# Altium PCB SpaceVNXDaughterBoard.PcbDoc (part 2 of 2)
Units mm, origin at the board's own origin, x right, y up, seen from the top; angles counter-clockwise.
Board outline 55 x 84 mm, 4 copper layers (Top Layer, PWR, GND, Bottom Layer), stack 0.84 mm thick; 87 components, 125 nets, 647 pads, 201 vias.
Unrouted connection lines stored in the file: 124.
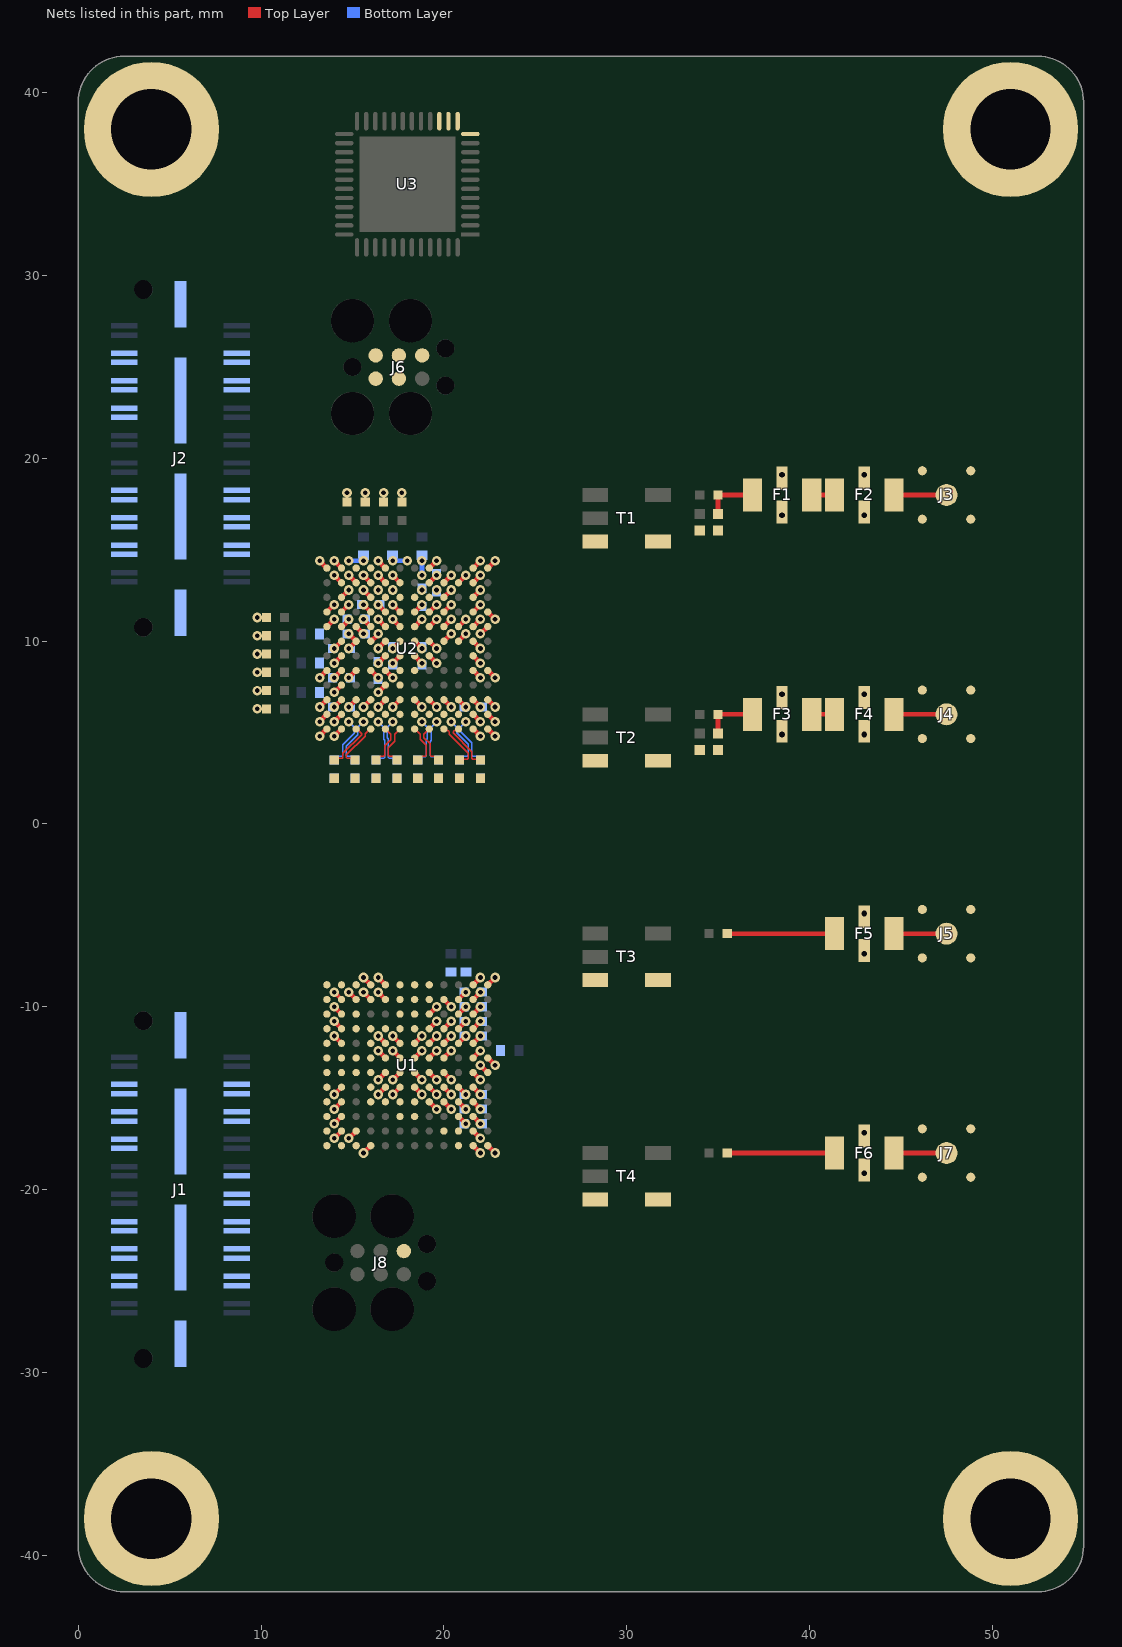
[diagram p4: the nets of this part, all layers, seen from the top]

## Via types
v1: diameter 0.525, hole 0.254, Top Layer to Bottom Layer, 189 vias
v2: diameter 0.61, hole 0.305, Top Layer to Bottom Layer, 12 vias

## Nets (pads, with @x,y where several pads share a name; then routed paths per layer and width w, separated by ;. In a path a pad name is that pad's centre, name@x,y a point inside that pad or via, vN(x,y) a via of type N, cw(c..) or ccw(c..) an arc to the next point about the centre after c; other vN are vias at no path point) (continued)
GND: C21.1 C22.1 C23.1 C24.1 C25.1 C26.1 C27.1 C28.1 C29.1 C30.1 C31.1 C32.1 C33.1 C34.1 C35.1 C36.1 C37.1 C38.1 C39.1 C40.1 C41.1 C42.1 C43.1 C44.1 C45.1 C46.1 C47.1 C48.1 C49.1 F1.2 F2.2 F3.2 F4.2 F5.2 F6.2 J1.G1 J1.G2 J1.G3 J1.G4 J2.G1 J2.G2 J2.G3 J2.G4 J3.G1 J3.G2 J3.G3 J3.G4 J4.G1 J4.G2 J4.G3 J4.G4 J5.G1 J5.G2 J5.G3 J5.G4 J6.6 J7.G1 J7.G2 J7.G3 J7.G4 J8.6 MP1.1 MP2.1 MP3.1 MP4.1 R1.1 R2.1 R3.1 R4.1 T1.1 T1.5 T2.1 T2.5 T3.1 T3.5 T4.1 T4.5 U1.A4 U1.A5 U1.A11 U1.A12 U1.B2 U1.B3 U1.B4 U1.B5 U1.B11 U1.C2 U1.C3 U1.C8 U1.C11 U1.D2 U1.D8 U1.D11 U1.E2 U1.E5 U1.E6 U1.E7 U1.E8 U1.E11 U1.F5 U1.F6 U1.F7 U1.F8 U1.F11 U1.F12 U1.G5 U1.G6 U1.G7 U1.G8 U1.G11 U1.G12 U1.H2 U1.H5 U1.H6 U1.H7 U1.H8 U1.H11 U1.J2 U1.J8 U1.J11 U1.K2 U1.K11 U1.L2 U1.L3 U1.L11 U1.M4 U1.M11 U1.M12 U2.A1 U2.A4 U2.A5 U2.A8 U2.A11 U2.A12 U2.B1 U2.B2 U2.B3 U2.B4 U2.B5 U2.B6 U2.B7 U2.B8 U2.B11 U2.B12 U2.C2 U2.C5 U2.C6 U2.C10 U2.D2 U2.D3 U2.E1 U2.E2 U2.E4 U2.E7 U2.F4 U2.F7 U2.F10 U2.G2 U2.G4 U2.G7 U2.G10 U2.H1 U2.H2 U2.H4 U2.H7 U2.J2 U2.J3 U2.K2 U2.K5 U2.K10 U2.L1 U2.L2 U2.L3 U2.L4 U2.L5 U2.L6 U2.L7 U2.L8 U2.L9 U2.L11 U2.L12 U2.M1 U2.M4 U2.M5 U2.M8 U2.M11 U2.M12 | length 61.7
  Top Layer w0.254: v1(13.2,4.8) U2.M12@13.6,5.2 ; v1(13.2,5.6) U2.M11@13.6,6 ; v1(13.2,8) U2.M8@13.6,8.4 ; v1(13.2,14.4) U2.M1@13.6,14 ; U2.M5@13.6,10.8 v1(14,11.2) ; U2.M4@13.6,11.6 v1(14,12) ; v1(14,-17.2) U1.L2@14.4,-16.8 ; v1(14,-16.4) U1.K2@14.4,-16 ; v1(14,-15.6) U1.J2@14.4,-15.2 ; v1(14,-14.8) U1.H2@14.4,-14.4 ; v1(14,-11.6) U1.E2@14.4,-12 ; v1(14,-10.8) U1.D2@14.4,-11.2 ; v1(14,-10) U1.C2@14.4,-10.4 ; v1(14,-9.2) U1.B2@14.4,-9.6 ; v1(14,4.8) U2.L12@14.4,5.2 ; v1(14,5.6) U2.L11@14.4,6 ; v1(14,7.2) U2.L9@14.4,7.6 ; v1(14,8) U2.L8@14.4,8.4 ; v1(14,8.8) U2.L7@14.4,9.2 ; v1(14,9.6) U2.L6@14.4,10 ; v1(14,13.6) U2.L2@14.4,13.2 ; v1(14,14.4) U2.L1@14.4,14 ; U2.L5@14.4,10.8 14.44,10.8 14.513,10.873 14.516,10.873 14.8,11.157 v1(14.8,11.2) ; U2.L4@14.4,11.6 v1(14.8,12) ; U2.L3@14.4,12.4 v1(14.8,12.8) ; v1(14.8,-17.2) U1.L3@15.2,-16.8 ; v1(14.8,-9.2) U1.B3@15.2,-9.6 ; v1(14.8,6.4) U2.K10@15.2,6.8 ; v1(14.8,13.6) U2.K2@15.2,13.2 ; U2.K5@15.2,10.8 v1(15.6,10.4) ; v1(15.6,-18) U1.M4@16,-17.6 ; v1(15.6,-9.2) U1.B4@16,-9.6 ; v1(15.6,-8.4) U1.A4@16,-8.8 ; v1(15.6,12.8) U2.J3@16,12.4 ; v1(15.6,13.6) U2.J2@16,13.2 ; v1(16.4,-14.8) U1.H5@16.8,-14.4 ; v1(16.4,-14) U1.G5@16.8,-13.6 ; v1(16.4,-12.4) U1.F5@16.8,-12.8 ; v1(16.4,-11.6) U1.E5@16.8,-12 ; v1(16.4,-9.2) U1.B5@16.8,-9.6 ; v1(16.4,-8.4) U1.A5@16.8,-8.8 ; v1(16.4,8.8) U2.H7@16.8,9.2 ; v1(16.4,12) U2.H4@16.8,11.6 ; v1(16.4,13.6) U2.H2@16.8,13.2 ; v1(16.4,14.4) U2.H1@16.8,14 ; v1(17.2,-14.8) U1.H6@17.6,-14.4 ; v1(17.2,-14) U1.G6@17.6,-13.6 ; v1(17.2,-12.4) U1.F6@17.6,-12.8 ; v1(17.2,-11.6) U1.E6@17.6,-12 ; v1(17.2,6.4) U2.G10@17.6,6.8 ; v1(17.2,8.8) U2.G7@17.6,9.2 ; v1(17.2,12) U2.G4@17.6,11.6 ; v1(17.2,13.6) U2.G2@17.6,13.2 ; U1.H7@18.4,-14.4 v1(18.8,-14.8) ; U1.G7@18.4,-13.6 v1(18.8,-14) ; U1.F7@18.4,-12.8 v1(18.8,-12.4) ; U1.E7@18.4,-12 v1(18.8,-11.6) ; U2.F10@18.4,6.8 v1(18.8,6.4) ; U2.F7@18.4,9.2 v1(18.8,8.8) ; U2.F4@18.4,11.6 v1(18.8,12) ; U1.J8@19.2,-15.2 v1(19.6,-15.6) ; U1.H8@19.2,-14.4 v1(19.6,-14.8) ; U1.G8@19.2,-13.6 v1(19.6,-14) ; U1.F8@19.2,-12.8 v1(19.6,-12.4) ; U1.E8@19.2,-12 v1(19.6,-11.6) ; U1.D8@19.2,-11.2 v1(19.6,-10.8) ; U1.C8@19.2,-10.4 v1(19.6,-10) ; U2.E7@19.2,9.2 v1(19.6,8.8) ; U2.E4@19.2,11.6 v1(19.6,12) ; U2.E2@19.2,13.2 v1(19.6,13.6) ; U2.E1@19.2,14 v1(19.6,14.4) ; U2.D3@20,12.4 v1(20.4,12.8) ; U2.D2@20,13.2 v1(20.4,13.6) ; U2.C10@20.8,6.8 v1(21.2,6.4) ; U2.C6@20.8,10 v1(21.2,10.4) ; U2.C5@20.8,10.8 v1(21.2,11.2) ; U2.C2@20.8,13.2 v1(21.2,13.6) ; U1.M11@21.6,-17.6 v1(22,-18) ; U1.L11@21.6,-16.8 v1(22,-17.2) ; U1.K11@21.6,-16 v1(22,-16.4) ; U1.J11@21.6,-15.2 v1(22,-15.6) ; U1.H11@21.6,-14.4 v1(22,-14.8) ; U1.G11@21.6,-13.6 v1(22,-14) ; U1.F11@21.6,-12.8 v1(22,-12.4) ; U1.E11@21.6,-12 v1(22,-11.6) ; U1.D11@21.6,-11.2 v1(22,-10.8) ; U1.C11@21.6,-10.4 v1(22,-10) ; U1.B11@21.6,-9.6 v1(22,-9.2) ; U1.A11@21.6,-8.8 v1(22,-8.4) ; U2.B12@21.6,5.2 v1(22,4.8) ; U2.B11@21.6,6 v1(22,5.6) ; U2.B8@21.6,8.4 v1(22,8) ; U2.B7@21.6,9.2 v1(22,8.8) ; U2.B6@21.6,10 v1(22,9.6) ; U2.B5@21.6,10.8 v1(22,11.2) ; U2.B4@21.6,11.6 v1(22,12) ; U2.B3@21.6,12.4 v1(22,12.8) ; U2.B2@21.6,13.2 v1(22,13.6) ; U2.B1@21.6,14 v1(22,14.4) ; v1(22,-13.2) U1.G12@22.4,-13.6 ; v1(22,10.4) U2.A5@22.4,10.8 ; U1.M12@22.4,-17.6 v1(22.8,-18) ; U1.F12@22.4,-12.8 v1(22.8,-13.2) ; U1.A12@22.4,-8.8 v1(22.8,-8.4) ; U2.A12@22.4,5.2 v1(22.8,4.8) ; U2.A11@22.4,6 v1(22.8,5.6) ; U2.A8@22.4,8.4 v1(22.8,8) ; U2.A4@22.4,11.6 v1(22.8,11.2) ; U2.A1@22.4,14 v1(22.8,14.4)
  other v1: 9.787,6.3 9.787,7.3 9.787,8.3 9.787,9.3 9.787,10.3 9.787,11.3 14.7,18.113 15.7,18.113 16.7,18.113 17.7,18.113
  other v2: 43,-19.105 43,-16.895 43,-7.105 43,-4.895 38.5,4.895 43,4.895 38.5,7.105 43,7.105 38.5,16.895 43,16.895 38.5,19.105 43,19.105
J1_C2P_CLK_N: J1.36 U2.K1
J1_C2P_CLK_P: J1.34 U2.J1
J1_P2C_CLK_N: J1.35
J1_P2C_CLK_P: J1.33
J1_REFCLK_N: J1.15
J1_REFCLK_P: J1.13
J1_RX0_N: J1.07 U1.E1
J1_RX0_P: J1.05 U1.F1
J1_RX1_N: J1.11 U1.D1
J1_RX1_P: J1.09 U1.C1
J1_RX2_N: J1.27 U1.A1
J1_RX2_P: J1.25 U1.B1
J1_RX3_N: J1.31 U1.A2
J1_RX3_P: J1.29 U1.A3
J1_TX0_N: C10.1 J1.12
J1_TX0_P: C9.1 J1.10
J1_TX1_N: C12.1 J1.08
J1_TX1_P: C11.1 J1.06
J1_TX2_N: C14.1 J1.32
J1_TX2_P: C13.1 J1.30
J1_TX3_N: C16.1 J1.28
J1_TX3_P: C15.1 J1.26
J2_C2P_CLK_N: J2.36 U1.A6
J2_C2P_CLK_P: J2.34 U1.A7
J2_P2C_CLK_N: J2.35 U1.B6
J2_P2C_CLK_P: J2.33 U1.B7
J2_REFCLK_N: J2.15
J2_REFCLK_P: J2.13
J2_RX0_N: J2.07 U1.H1
J2_RX0_P: J2.05 U1.G1
J2_RX1_N: J2.11 U1.J1
J2_RX1_P: J2.09 U1.K1
J2_RX2_N: J2.27 U1.M1
J2_RX2_P: J2.25 U1.L1
J2_RX3_N: J2.31 U1.M2
J2_RX3_P: J2.29 U1.M3
J2_TX0_N: C2.1 J2.08
J2_TX0_P: C1.1 J2.06
J2_TX1_N: C4.1 J2.12
J2_TX1_P: C3.1 J2.10
J2_TX2_N: C6.1 J2.28
J2_TX2_P: C5.1 J2.26
J2_TX3_N: C8.1 J2.32
J2_TX3_P: C7.1 J2.30
MCU_TCK: J6.3 U3.15
MCU_TDI: J6.4 U3.13
MCU_TDO: J6.2 U3.12
MCU_TMS: J6.1 U3.14
RF_FLT0: F1.3 F2.1 | length 1.2
  Top Layer w0.254: F1.3@40.126,18 F2.1@41.374,18
RF_FLT1: F3.3 F4.1 | length 1.2
  Top Layer w0.254: F3.3@40.126,6 F4.1@41.374,6
RF_MTH0: C17.2 F1.1 R2.2 | length 2.9
  Top Layer w0.254: R2.2@35,16.95 C17.2@35,18 F1.1@36.874,18
RF_MTH1: C18.2 F3.1 R4.2 | length 2.9
  Top Layer w0.254: R4.2@35,4.95 C18.2@35,6 F3.1@36.874,6
RF_MTH2: C19.2 F5.1 | length 5.9
  Top Layer w0.254: C19.2@35.5,-6 F5.1@41.374,-6
RF_MTH3: C20.2 F6.1 | length 5.9
  Top Layer w0.254: C20.2@35.5,-18 F6.1@41.374,-18
RF_RX0: F4.3 J4.S1 | length 2.9
  Top Layer w0.254: F4.3@44.626,6 J4.S1@47.5,6
RF_RX1: F2.3 J3.S1 | length 2.9
  Top Layer w0.254: F2.3@44.626,18 J3.S1@47.5,18
RF_TX0: F5.3 J5.S1 | length 2.9
  Top Layer w0.254: F5.3@44.626,-6 J5.S1@47.5,-6
RF_TX1: F6.3 J7.S1 | length 2.9
  Top Layer w0.254: F6.3@44.626,-18 J7.S1@47.5,-18
SPI_CLK: J1.20 U1.L9 U2.F8
SPI_SDI: J1.22 U1.L10 U2.G8
SPI_SDO: J1.24 U1.M10 U2.G9
TX0_N: C2.2 U2.K12 | length 2.7
  Top Layer w0.073: C2.2@14,3.5 14.086,3.586 14.428,3.586 14.471,3.629 14.471,3.861 15.5,4.89 15.5,4.951 15.251,5.2 U2.K12@15.2,5.2
TX0_P: C1.2 U2.J12 | length 2.7
  Top Layer w0.073: C1.2@15.143,3.5 15.057,3.586 14.714,3.586 14.671,3.629 14.671,3.778 15.7,4.807 15.7,4.951 15.949,5.2 U2.J12@16,5.2
TX1_N: C4.2 U2.H12 | length 2.3
  Top Layer w0.073: C4.2@16.286,3.5 16.499,3.713 16.714,3.713 16.757,3.756 16.757,4.268 17.1,4.611 17.1,4.9 U2.H12@16.8,5.2
TX1_P: C3.2 U2.G12 | length 2.3
  Top Layer w0.073: C3.2@17.428,3.5 17.215,3.713 17,3.713 16.957,3.756 16.957,4.185 17.3,4.528 17.3,4.9 U2.G12@17.6,5.2
TX2_N: C6.2 U2.F12 | length 2.3
  Top Layer w0.073: U2.F12@18.4,5.2 18.7,4.9 18.7,4.645 19.043,4.303 19.043,3.756 19,3.713 18.785,3.713 C6.2@18.571,3.5
TX2_P: C5.2 U2.E12 | length 2.3
  Top Layer w0.073: U2.E12@19.2,5.2 18.9,4.9 18.9,4.728 19.243,4.385 19.243,3.756 19.286,3.713 19.501,3.713 C5.2@19.714,3.5
TX3_N: C8.2 U2.D12 | length 2.8
  Top Layer w0.073: U2.D12@20,5.2 20.088,5.2 20.199,5.089 20.257,5.089 20.3,5.046 20.3,4.903 21.328,3.874 21.328,3.586 21.285,3.543 20.9,3.543 C8.2@20.857,3.5
TX3_P: C7.2 U2.C12 | length 2.8
  Top Layer w0.073: U2.C12@20.8,5.2 20.712,5.2 20.601,5.089 20.543,5.089 20.5,5.046 20.5,4.986 21.529,3.957 21.529,3.586 21.571,3.543 21.957,3.543 C7.2@22,3.5
TX4_N: C10.2 U2.K11 | length 2.8
  Bottom Layer w0.073: C10.2@14,3.5 14.213,3.713 14.429,3.713 14.471,3.756 14.471,4.325 15.1,4.954 15.1,5.3 v1(14.8,5.6)
TX4_P: C9.2 U2.J11 | length 2.8
  Bottom Layer w0.073: C9.2@15.143,3.5 14.93,3.713 14.715,3.713 14.672,3.756 14.672,4.242 15.3,4.871 15.3,5.3 v1(15.6,5.6)
TX5_N: C12.2 U2.H11 | length 2.6
  Bottom Layer w0.073: C12.2@16.286,3.5 16.372,3.586 16.714,3.586 16.757,3.629 16.757,4.581 16.7,4.639 16.7,5.3 v1(16.4,5.6)
TX5_P: C11.2 U2.G11 | length 2.6
  Bottom Layer w0.073: v1(17.2,5.6) 16.9,5.3 16.9,4.722 16.957,4.664 16.957,3.629 17,3.586 17.343,3.586 C11.2@17.429,3.5
TX6_N: C14.2 U2.F11 | length 2.6
  Bottom Layer w0.073: C14.2@18.572,3.5 18.754,3.683 19,3.683 19.043,3.726 19.043,4.596 19.1,4.653 19.1,5.3 v1(18.8,5.6)
TX6_P: C13.2 U2.E11 | length 2.6
  Bottom Layer w0.073: v1(19.6,5.6) 19.3,5.3 19.3,4.57 19.243,4.513 19.243,3.726 19.286,3.683 19.531,3.683 C13.2@19.714,3.5
TX7_N: C16.2 U2.D11 | length 2.8
  Bottom Layer w0.073: v1(20.4,5.6) 20.7,5.3 20.7,4.988 21.329,4.36 21.329,3.756 21.286,3.713 21.071,3.713 C16.2@20.857,3.5
TX7_P: C15.2 U2.C11 | length 2.8
  Bottom Layer w0.073: v1(21.2,5.6) 20.9,5.3 20.9,5.071 21.529,4.442 21.529,3.756 21.572,3.713 21.787,3.713 C15.2@22,3.5
VA11: C21.2 C22.2 FB1.2 U2.D6 U2.E3 U2.E5 U2.F3 U2.F5 U2.G3 U2.G5 U2.H3 U2.H5 U2.J6 | length 3.4
  Top Layer w0.254: U2.J6@16,10 16.04,10 16.113,10.073 16.116,10.073 16.4,10.357 v1(16.4,10.4) ; v1(16.4,11.2) U2.H5@16.8,10.8 ; v1(17.2,11.2) U2.G5@17.6,10.8 ; U2.F5@18.4,10.8 v1(18.8,11.2) ; U2.E5@19.2,10.8 v1(19.6,11.2) ; U2.D6@20,10 v1(20.4,10.4)
  other v1: 16.4,12.8 17.2,12.8 18.8,12.8 19.6,12.8
VA19: C41.2 C42.2 FB6.2 U2.D4 U2.D5 U2.E6 U2.F6 U2.G6 U2.H6 | length 4.2
  Top Layer w0.254: v1(16.4,9.6) U2.H6@16.8,10 ; v1(17.2,9.6) U2.G6@17.6,10 ; U2.F6@18.4,10 v1(18.8,9.6) ; U2.E6@19.2,10 v1(19.6,9.6) ; U2.D5@20,10.8 v1(20.4,11.2) ; U2.D4@20,11.6 v1(20.4,12)
  Bottom Layer w0.254: v1(18.8,13.6) v1(18.8,14.4)
VD11: C29.2 C30.2 FB3.2 U2.A10 U2.B10 U2.D10 U2.E10 U2.H8 U2.H9 U2.H10 U2.J10 U2.L10 U2.M10 | length 5.7
  Top Layer w0.254: v1(13.2,6.4) U2.M10@13.6,6.8 ; v1(14,6.4) U2.L10@14.4,6.8 ; v1(15.6,6.4) U2.J10@16,6.8 ; v1(16.4,6.4) U2.H10@16.8,6.8 ; v1(16.4,7.2) U2.H9@16.8,7.6 ; U2.H8@16.8,8.4 v1(17.2,8) ; U2.E10@19.2,6.8 v1(19.6,6.4) ; U2.D10@20,6.8 v1(20.4,6.4) ; U2.B10@21.6,6.8 v1(22,6.4) ; U2.A10@22.4,6.8 v1(22.8,6.4)
VDDAPLL18: C45.2 FB8.2 U1.B9 U1.B10 | length 1.1
  Top Layer w0.254: U1.B9@20,-9.6 v1(20.4,-10) ; U1.B10@20.8,-9.6 v1(21.2,-9.2)
VDDAREF18: C43.2 C44.2 FB7.2 U1.C10 U1.K10 | length 1.1
  Top Layer w0.254: U1.K10@20.8,-16 v1(21.2,-16.4) ; U1.C10@20.8,-10.4 v1(21.2,-10)
VDDCLK09: U1.A8 U1.B8
VDDDAC09: U1.D9 U1.E9 U1.F9 U1.G9 U1.H9 U1.J9 | length 3.4
  Top Layer w0.254: U1.J9@20,-15.2 v1(20.4,-15.6) ; U1.H9@20,-14.4 v1(20.4,-14.8) ; U1.G9@20,-13.6 v1(20.4,-14) ; U1.F9@20,-12.8 v1(20.4,-12.4) ; U1.E9@20,-12 v1(20.4,-11.6) ; U1.D9@20,-11.2 v1(20.4,-10.8)
VDDDAC33: C46.2 C47.2 C48.2 C49.2 FB9.2 U1.D10 U1.E10 U1.H10 U1.J10 | length 2.3
  Top Layer w0.254: U1.J10@20.8,-15.2 v1(21.2,-15.6) ; U1.H10@20.8,-14.4 v1(21.2,-14.8) ; U1.E10@20.8,-12 v1(21.2,-11.6) ; U1.D10@20.8,-11.2 v1(21.2,-10.8)
VDDDIG09: U1.D3 U1.D4 U1.D5 U1.E4 U1.F4 U1.G4 U1.H4 U1.J4 U1.J5 U1.J6 U1.J7
VDDIO18: U1.K6 U1.K7
VDDR18: U1.F2 U1.G2
VDDS18: U1.C6 U1.C7 U1.D6 U1.D7
VDDT09: U1.F3 U1.G3
VPLL19: C27.2 C28.2 FB2.2 U2.J4 U2.J5 | length 1.9
  Top Layer w0.254: v1(15.6,11.2) U2.J5@16,10.8 ; v1(15.6,12) U2.J4@16,11.6
  Bottom Layer w0.254: v1(17.2,14.4) v1(18,14.4)
VREFO: C35.2 C36.2 FB4.2 U2.K6 | length 1.9
  Top Layer w0.254: v1(14.8,9.6) U2.K6@15.2,10 v1(14.8,10.4)
  Bottom Layer w0.254: v1(14.8,14.4) v1(15.6,14.4)
VTRIG: C37.2 C38.2 FB5.2 U2.J8 U2.K8 | length 1.1
  Top Layer w0.254: v1(14.8,8) U2.K8@15.2,8.4 ; U2.J8@16,8.4 v1(16.4,8)
pads on no net: J1. J1.01 J1.03 J1.04 J1.16 J1.17 J1.19 J1.21 J1.23 J1.37 J1.38 J1.39 J2. J2.01 J2.03 J2.04 J2.17 J2.19 J2.21 J2.22 J2.23 J2.24 J2.37 J2.38 J2.39 J6.5 J6.A J6.B J6.C J6.D J6.E J6.F J6.G J8.A J8.B J8.C J8.D J8.E J8.F J8.G U1.A9 U1.A10 U1.C4 U1.C5 U1.C9 U1.D12 U1.E3 U1.E12 U1.F10 U1.G10 U1.H3 U1.K3 U1.K9 U1.K12 U1.L12 U1.M6 U1.M7 U2.A9 U2.B9 U2.C1 U2.C3 U2.C7 U2.C8 U2.C9 U2.D1 U2.D7 U2.D8 U2.D9 U2.E9 U2.F1 U2.F2 U2.F9 U2.G1 U2.J7 U2.J9 U2.K3 U2.K4 U2.K7 U2.K9 U2.M2 U2.M3 U2.M6 U2.M7 U2.M9 U3.1 U3.2 U3.3 U3.4 U3.5 U3.6 U3.7 U3.8 U3.9 U3.10 U3.11 U3.16 U3.17 U3.18 U3.19 U3.20 U3.21 U3.22 U3.23 U3.24 U3.25 U3.26 U3.27 U3.28 U3.29 U3.30 U3.31 U3.32 U3.33 U3.34 U3.35 U3.36 U3.37 U3.38 U3.39 U3.40 U3.41 U3.42 U3.43 U3.44 U3.45 U3.46 U3.47 U3.48 U3.49

## Polygon pours and split planes (outlines as drawn)
no net on Bottom Solder (solid): 55,-39.501 ccw(c52.501,-39.501) 55,-39.5 55,39.5 55,39.501 ccw(c52.501,39.501) 52.501,42 ccw(c52.501,39.501) 52.5,42 2.5,42 ccw(c2.499,39.501) 2.499,42 ccw(c2.499,39.501) 0,39.501 0,-39.501 ccw(c2.499,-39.501) 2.499,-42 ccw(c2.499,-39.501) 2.5,-42 52.5,-42 ccw(c52.501,-39.501) 52.501,-42 ccw(c52.501,-39.501)
no net on Top Solder "NONET_L-01_P-001" (solid): 0,-39.5 0,39.5 cw(c2.499,39.501) 2.5,42 52.5,42 cw(c52.501,39.501) 55,39.5 55,-39.5 cw(c52.501,-39.501) 52.5,-42 2.5,-42 cw(c2.499,-39.501)
GND on Bottom Layer "NONET_L04_P002" (solid, shelved, pour order 2): 2.5,-42 cw(c2.499,-39.501) 0,-39.5 0,39.5 cw(c2.499,39.501) 2.5,42 52.5,42 cw(c52.501,39.501) 55,39.5 55,-39.5 cw(c52.501,-39.501) 52.5,-42
+1.9V on Bottom Layer "+1.9V_L04_P006" (solid, pour order 6): 14.45,16.862 19.1,16.862 19.1,15.45 14.45,15.45
+1.1V on Bottom Layer "+1.1V_L04_P003" (solid, pour order 3): 11.037,11.55 12.45,11.55 12.45,6.05 11.037,6.05
GND on Top Layer "GND_L01_P000" (solid, pour order 0): 2.5,-42 cw(c2.499,-39.501) 0,-39.5 0,39.5 cw(c2.499,39.501) 2.5,42 52.5,42 cw(c52.501,39.501) 55,39.5 55,-39.5 cw(c52.501,-39.501) 52.5,-42
GND on GND (split plane): 532 vertices, not listed, extent 0.51,-41.49 54.49,41.49
VPLL19 on PWR (split plane): 18.159,13.21 16.129,13.21 16.079,13.201 16.037,13.173 16.009,13.131 16,13.081 16,10.543 15.242,10.543 15.242,13.841 16.045,13.841 16.094,13.85 16.136,13.878 16.164,13.92 16.174,13.97 16.174,15.111 18.159,15.111
+1.9V on PWR (split plane): 18.159,15.369 12.702,15.369 12.702,17.984 18.159,17.984
VD11 on PWR (split plane): 23.239,5.729 12.702,5.729 12.702,7.071 15.6,7.071 15.65,7.08 15.692,7.108 17.254,8.671 23.239,8.671
VTRIG on PWR (split plane): 14.349,8.708 14.391,8.68 14.441,8.671 16.887,8.671 15.546,7.329 12.702,7.329 12.702,10.031 13.027,10.031
VREFO on PWR (split plane): 15.915,14.099 15.113,14.099 15.063,14.09 15.021,14.062 14.993,14.02 14.984,13.97 14.984,10.414 14.993,10.364 15.021,10.322 15.063,10.294 15.113,10.285 15.471,10.285 15.471,8.929 14.495,8.929 13.173,10.252 13.131,10.28 13.081,10.289 12.702,10.289 12.702,15.111 15.915,15.111
+1.1V on PWR (split plane): 12.444,5.729 9.916,5.729 9.916,11.891 12.444,11.891
VD11 on PWR (split plane): 532 vertices, not listed, extent 0.51,-41.49 54.49,41.49

## Other copper
Top Layer:
  pour cut-out: 3.309,-33.553 cw(c3,-31.577) 1,-31.577 1,31.578 cw(c3,31.578) 3.308,33.554 ccw(c4.002,38) 8.502,38 cw(c10.502,38) 10.502,40 24.511,40 cw(c24.511,34.511) 30,34.511 30,-34.5 cw(c24.5,-34.5) 24.5,-40 10.503,-40 cw(c10.503,-38) 8.503,-38 ccw(c4.003,-37.999)
  pour cut-out: 45.243,19.136 45.326,19.081 45.381,18.999 45.4,18.902 45.4,18.391 46.735,18.391 46.856,18.574 46.926,18.644 47.125,18.776 47.19,18.803 47.216,18.814 47.45,18.861 47.475,18.861 47.5,18.866 47.525,18.861 47.55,18.861 47.784,18.814 47.822,18.798 47.875,18.776 48.074,18.644 48.144,18.574 48.276,18.375 48.303,18.31 48.314,18.284 48.361,18.05 48.361,17.95 48.314,17.716 48.298,17.678 48.276,17.625 48.144,17.426 48.074,17.356 47.875,17.224 47.81,17.197 47.784,17.186 47.55,17.139 47.525,17.139 47.5,17.134 47.475,17.139 47.45,17.139 47.216,17.186 47.178,17.202 47.125,17.224 46.926,17.356 46.856,17.426 46.735,17.609 45.4,17.609 45.4,17.098 45.381,17.001 45.326,16.919 45.243,16.864 45.146,16.845 44.105,16.845 44.008,16.864 43.925,16.919 43.87,17.001 43.851,17.098 43.851,18.902 43.87,18.999 43.925,19.081 44.008,19.136 44.105,19.155 45.146,19.155
  pour cut-out: 34.5,17.731 34.485,17.653 34.43,17.571 34.391,17.545 34.391,17.447 34.454,17.404 34.5,17.336 34.546,17.404 34.609,17.447 34.609,17.545 34.571,17.571 34.516,17.653
  pour cut-out: 37.492,19.136 37.575,19.081 37.63,18.999 37.649,18.902 37.649,17.098 37.63,17.001 37.575,16.919 37.492,16.864 37.395,16.845 36.354,16.845 36.257,16.864 36.174,16.919 36.119,17.001 36.1,17.098 36.1,17.609 35.455,17.609 35.43,17.571 35.391,17.545 35.391,17.447 35.454,17.404 35.509,17.322 35.529,17.225 35.529,16.675 35.509,16.578 35.454,16.496 35.372,16.441 35.275,16.421 34.725,16.421 34.628,16.441 34.546,16.496 34.5,16.564 34.454,16.496 34.372,16.441 34.275,16.421 33.725,16.421 33.628,16.441 33.546,16.496 33.491,16.578 33.471,16.675 33.471,17.225 33.491,17.322 33.546,17.404 33.609,17.447 33.609,17.545 33.571,17.571 33.545,17.609 32.667,17.609 32.649,17.523 32.594,17.441 32.512,17.386 32.415,17.366 31.015,17.366 30.918,17.386 30.836,17.441 30.781,17.523 30.761,17.62 30.761,18.38 30.781,18.477 30.836,18.559 30.918,18.614 31.015,18.634 32.415,18.634 32.512,18.614 32.594,18.559 32.649,18.477 32.667,18.391 33.545,18.391 33.571,18.43 33.653,18.485 33.75,18.504 34.25,18.504 34.347,18.485 34.43,18.43 34.485,18.347 34.5,18.269 34.516,18.347 34.571,18.43 34.653,18.485 34.75,18.504 35.25,18.504 35.347,18.485 35.43,18.43 35.455,18.391 36.1,18.391 36.1,18.902 36.119,18.999 36.174,19.081 36.257,19.136 36.354,19.155 37.395,19.155
  pour cut-out: 41.992,19.136 42.075,19.081 42.13,18.999 42.149,18.902 42.149,17.098 42.13,17.001 42.075,16.919 41.992,16.864 41.895,16.845 40.854,16.845 40.757,16.864 40.75,16.868 40.743,16.864 40.646,16.845 39.605,16.845 39.508,16.864 39.425,16.919 39.37,17.001 39.351,17.098 39.351,18.902 39.37,18.999 39.425,19.081 39.508,19.136 39.605,19.155 40.646,19.155 40.743,19.136 40.75,19.132 40.757,19.136 40.854,19.155 41.895,19.155
  pour cut-out: 45.243,7.136 45.326,7.081 45.381,6.999 45.4,6.902 45.4,6.391 46.735,6.391 46.856,6.574 46.926,6.644 47.125,6.776 47.19,6.803 47.216,6.814 47.45,6.861 47.475,6.861 47.5,6.866 47.525,6.861 47.55,6.861 47.784,6.814 47.822,6.798 47.875,6.776 48.074,6.644 48.144,6.574 48.276,6.375 48.303,6.31 48.314,6.284 48.361,6.05 48.361,5.95 48.314,5.716 48.298,5.678 48.276,5.625 48.144,5.426 48.074,5.356 47.875,5.224 47.81,5.197 47.784,5.186 47.55,5.139 47.525,5.139 47.5,5.134 47.475,5.139 47.45,5.139 47.216,5.186 47.178,5.202 47.125,5.224 46.926,5.356 46.856,5.426 46.735,5.609 45.4,5.609 45.4,5.098 45.381,5.001 45.326,4.919 45.243,4.864 45.146,4.845 44.105,4.845 44.008,4.864 43.925,4.919 43.87,5.001 43.851,5.098 43.851,6.902 43.87,6.999 43.925,7.081 44.008,7.136 44.105,7.155 45.146,7.155
  pour cut-out: 34.5,5.731 34.485,5.653 34.43,5.571 34.391,5.545 34.391,5.447 34.454,5.404 34.5,5.336 34.546,5.404 34.609,5.447 34.609,5.545 34.571,5.571 34.516,5.653
  pour cut-out: 37.492,7.136 37.575,7.081 37.63,6.999 37.649,6.902 37.649,5.098 37.63,5.001 37.575,4.919 37.492,4.864 37.395,4.845 36.354,4.845 36.257,4.864 36.174,4.919 36.119,5.001 36.1,5.098 36.1,5.609 35.455,5.609 35.43,5.571 35.391,5.545 35.391,5.447 35.454,5.404 35.509,5.322 35.529,5.225 35.529,4.675 35.509,4.578 35.454,4.496 35.372,4.441 35.275,4.421 34.725,4.421 34.628,4.441 34.546,4.496 34.5,4.564 34.454,4.496 34.372,4.441 34.275,4.421 33.725,4.421 33.628,4.441 33.546,4.496 33.491,4.578 33.471,4.675 33.471,5.225 33.491,5.322 33.546,5.404 33.609,5.447 33.609,5.545 33.571,5.571 33.545,5.609 32.667,5.609 32.649,5.523 32.594,5.441 32.512,5.386 32.415,5.366 31.015,5.366 30.918,5.386 30.836,5.441 30.781,5.523 30.761,5.62 30.761,6.38 30.781,6.477 30.836,6.559 30.918,6.614 31.015,6.634 32.415,6.634 32.512,6.614 32.594,6.559 32.649,6.477 32.667,6.391 33.545,6.391 33.571,6.43 33.653,6.485 33.75,6.504 34.25,6.504 34.347,6.485 34.43,6.43 34.485,6.347 34.5,6.269 34.516,6.347 34.571,6.43 34.653,6.485 34.75,6.504 35.25,6.504 35.347,6.485 35.43,6.43 35.455,6.391 36.1,6.391 36.1,6.902 36.119,6.999 36.174,7.081 36.257,7.136 36.354,7.155 37.395,7.155
  pour cut-out: 41.992,7.136 42.075,7.081 42.13,6.999 42.149,6.902 42.149,5.098 42.13,5.001 42.075,4.919 41.992,4.864 41.895,4.845 40.854,4.845 40.757,4.864 40.75,4.868 40.743,4.864 40.646,4.845 39.605,4.845 39.508,4.864 39.425,4.919 39.37,5.001 39.351,5.098 39.351,6.902 39.37,6.999 39.425,7.081 39.508,7.136 39.605,7.155 40.646,7.155 40.743,7.136 40.75,7.132 40.757,7.136 40.854,7.155 41.895,7.155
  pour cut-out: 45.243,-16.864 45.326,-16.919 45.381,-17.001 45.4,-17.098 45.4,-17.609 46.735,-17.609 46.856,-17.426 46.926,-17.356 47.125,-17.224 47.19,-17.197 47.216,-17.186 47.45,-17.139 47.475,-17.139 47.5,-17.134 47.525,-17.139 47.55,-17.139 47.784,-17.186 47.822,-17.202 47.875,-17.224 48.074,-17.356 48.144,-17.426 48.276,-17.625 48.303,-17.69 48.314,-17.716 48.361,-17.95 48.361,-18.05 48.314,-18.284 48.298,-18.322 48.276,-18.375 48.144,-18.574 48.074,-18.644 47.875,-18.776 47.81,-18.803 47.784,-18.814 47.55,-18.861 47.525,-18.861 47.5,-18.866 47.475,-18.861 47.45,-18.861 47.216,-18.814 47.178,-18.798 47.125,-18.776 46.926,-18.644 46.856,-18.574 46.735,-18.391 45.4,-18.391 45.4,-18.902 45.381,-18.999 45.326,-19.081 45.243,-19.136 45.146,-19.155 44.105,-19.155 44.008,-19.136 43.925,-19.081 43.87,-18.999 43.851,-18.902 43.851,-17.098 43.87,-17.001 43.925,-16.919 44.008,-16.864 44.105,-16.845 45.146,-16.845
  pour cut-out: 41.992,-16.864 42.075,-16.919 42.13,-17.001 42.149,-17.098 42.149,-18.902 42.13,-18.999 42.075,-19.081 41.992,-19.136 41.895,-19.155 40.854,-19.155 40.757,-19.136 40.674,-19.081 40.619,-18.999 40.6,-18.902 40.6,-18.391 35.955,-18.391 35.93,-18.429 35.847,-18.484 35.75,-18.504 35.25,-18.504 35.153,-18.484 35.071,-18.429 35.016,-18.347 35,-18.269 34.985,-18.347 34.93,-18.429 34.847,-18.484 34.75,-18.504 34.25,-18.504 34.153,-18.484 34.071,-18.429 34.045,-18.391 32.667,-18.391 32.649,-18.477 32.594,-18.559 32.512,-18.614 32.415,-18.634 31.015,-18.634 30.918,-18.614 30.836,-18.559 30.781,-18.477 30.761,-18.38 30.761,-17.62 30.781,-17.523 30.836,-17.441 30.918,-17.386 31.015,-17.366 32.415,-17.366 32.512,-17.386 32.594,-17.441 32.649,-17.523 32.667,-17.609 34.045,-17.609 34.071,-17.57 34.153,-17.515 34.25,-17.496 34.75,-17.496 34.847,-17.515 34.93,-17.57 34.985,-17.653 35,-17.731 35.016,-17.653 35.071,-17.57 35.153,-17.515 35.25,-17.496 35.75,-17.496 35.847,-17.515 35.93,-17.57 35.955,-17.609 40.6,-17.609 40.6,-17.098 40.619,-17.001 40.674,-16.919 40.757,-16.864 40.854,-16.845 41.895,-16.845
  pour cut-out: 45.243,-4.864 45.326,-4.919 45.381,-5.001 45.4,-5.098 45.4,-5.609 46.735,-5.609 46.856,-5.426 46.926,-5.356 47.125,-5.224 47.19,-5.197 47.216,-5.186 47.45,-5.139 47.475,-5.139 47.5,-5.134 47.525,-5.139 47.55,-5.139 47.784,-5.186 47.822,-5.202 47.875,-5.224 48.074,-5.356 48.144,-5.426 48.276,-5.625 48.303,-5.69 48.314,-5.716 48.361,-5.95 48.361,-6.05 48.314,-6.284 48.298,-6.322 48.276,-6.375 48.144,-6.574 48.074,-6.644 47.875,-6.776 47.81,-6.803 47.784,-6.814 47.55,-6.861 47.525,-6.861 47.5,-6.866 47.475,-6.861 47.45,-6.861 47.216,-6.814 47.178,-6.798 47.125,-6.776 46.926,-6.644 46.856,-6.574 46.735,-6.391 45.4,-6.391 45.4,-6.902 45.381,-6.999 45.326,-7.081 45.243,-7.136 45.146,-7.155 44.105,-7.155 44.008,-7.136 43.925,-7.081 43.87,-6.999 43.851,-6.902 43.851,-5.098 43.87,-5.001 43.925,-4.919 44.008,-4.864 44.105,-4.845 45.146,-4.845
  pour cut-out: 41.992,-4.864 42.075,-4.919 42.13,-5.001 42.149,-5.098 42.149,-6.902 42.13,-6.999 42.075,-7.081 41.992,-7.136 41.895,-7.155 40.854,-7.155 40.757,-7.136 40.674,-7.081 40.619,-6.999 40.6,-6.902 40.6,-6.391 35.955,-6.391 35.93,-6.429 35.847,-6.484 35.75,-6.504 35.25,-6.504 35.153,-6.484 35.071,-6.429 35.016,-6.347 35,-6.269 34.985,-6.347 34.93,-6.429 34.847,-6.484 34.75,-6.504 34.25,-6.504 34.153,-6.484 34.071,-6.429 34.045,-6.391 32.667,-6.391 32.649,-6.477 32.594,-6.559 32.512,-6.614 32.415,-6.634 31.015,-6.634 30.918,-6.614 30.836,-6.559 30.781,-6.477 30.761,-6.38 30.761,-5.62 30.781,-5.523 30.836,-5.441 30.918,-5.386 31.015,-5.366 32.415,-5.366 32.512,-5.386 32.594,-5.441 32.649,-5.523 32.667,-5.609 34.045,-5.609 34.071,-5.57 34.153,-5.515 34.25,-5.496 34.75,-5.496 34.847,-5.515 34.93,-5.57 34.985,-5.653 35,-5.731 35.016,-5.653 35.071,-5.57 35.153,-5.515 35.25,-5.496 35.75,-5.496 35.847,-5.515 35.93,-5.57 35.955,-5.609 40.6,-5.609 40.6,-5.098 40.619,-5.001 40.674,-4.919 40.757,-4.864 40.854,-4.845 41.895,-4.845
Bottom Layer:
  pour cut-out: 10.178,-18.695 10.178,-7.9 23.675,-7.9 23.605,-18.695
  pour cut-out: 23.495,1.778 12.7,1.778 12.7,15.275 23.495,15.205
PWR (plane layer: these items are gaps in the copper):
  lines w0.254: 12.571,15.24 18.288,15.24 ; 12.573,5.6 12.573,18.113 12.571,18.113 18.288,18.113 18.288,15.24 ; 12.573,7.2 15.6,7.2 17.2,8.8 15.6,8.8 ; 12.573,10.16 13.081,10.16 14.441,8.8 15.6,8.8 ; 12.573,12.02 9.787,12.02 9.787,5.6 12.7,5.6 23.368,5.6 23.368,8.8 16.764,8.8 ; 16.045,15.197 16.045,13.97 15.113,13.97 15.113,10.414 15.6,10.414 ; 15.6,8.8 15.6,10.414 ; 15.6,10.414 16.129,10.414 16.129,13.081 18.288,13.081 18.288,15.24

## Silkscreen, mask and mechanical layers (free items; w line width, h text height)
Top Solder:
  pour cut-out: 3.309,-33.553 cw(c3,-31.577) 1,-31.577 1,31.578 cw(c3,31.578) 3.308,33.554 ccw(c4.002,38) 8.502,38 cw(c10.502,38) 10.502,40 44.509,40 cw(c44.509,38) 46.509,38 ccw(c51.009,38) 49.624,33.718 cw(c49.009,31.815) 51.009,31.815 51.009,27.5 cw(c49.009,27.5) 49.009,25.5 31,25.5 ccw(c31,24.5) 30,24.5 30,23.5 ccw(c31,23.5) 31,22.5 49.009,22.5 cw(c49.009,20.5) 51.009,20.5 51.009,15.5 cw(c49.009,15.5) 49.009,13.5 31,13.5 ccw(c31,12.5) 30,12.5 30,11.5 ccw(c31,11.5) 31,10.5 49.009,10.5 cw(c49.009,8.5) 51.009,8.5 51.009,3.5 cw(c49.009,3.5) 49.009,1.5 31,1.5 ccw(c31,0.5) 30,0.5 30,-0.5 ccw(c31,-0.5) 31,-1.5 49.009,-1.5 cw(c49.009,-3.5) 51.009,-3.5 51.009,-8.5 cw(c49.009,-8.5) 49.009,-10.5 31,-10.5 ccw(c31,-11.5) 30,-11.5 30,-12.5 ccw(c31,-12.5) 31,-13.5 49.009,-13.5 cw(c49.009,-15.5) 51.009,-15.5 51.009,-20.5 cw(c49.009,-20.5) 49.009,-22.5 31,-22.5 ccw(c31,-23.5) 30,-23.5 30,-24.5 ccw(c31,-24.5) 31,-25.5 49.009,-25.5 cw(c49.009,-27.5) 51.009,-27.5 51.009,-31.815 cw(c49.009,-31.814) 49.621,-33.718 ccw(c50.996,-38.002) 46.497,-38.001 cw(c44.497,-38) 44.496,-40 10.503,-40 cw(c10.503,-38) 8.503,-38 ccw(c4.003,-37.999)
Bottom Solder:
  pour cut-out: 3.309,-33.553 cw(c4.003,-37.999) 4.003,-33.499 cw(c4.003,-37.999) 8.503,-37.999 cw(c4.003,-37.999) 8.503,-38 ccw(c10.503,-38) 10.503,-40 44.496,-40 ccw(c44.497,-38) 46.497,-38.001 cw(c50.996,-38.002) 49.621,-33.718 ccw(c49.009,-31.814) 51.009,-31.815 51.009,31.815 ccw(c49.009,31.815) 49.624,33.718 cw(c51.009,38) 46.509,38 ccw(c44.509,38) 44.509,40 10.502,40 ccw(c10.502,38) 8.502,38 cw(c4.002,38) 4.002,33.5 cw(c4.002,38) 3.308,33.554 ccw(c3,31.578) 3,33.578 ccw(c3,31.578) 1,31.578 1,-31.577 ccw(c3,-31.577) 3,-33.577 ccw(c3,-31.577)
Mechanical 1:
  the board outline again, w0.013
Mechanical 2:
  circle w0.013: c34.991,24 r1
  circle w0.013: c34.991,12 r1
  circle w0.013: c34.991,0 r1
  circle w0.013: c34.991,-12 r1
  circle w0.013: c34.991,-24 r1
  circle w0.013: c53,24 r1
  circle w0.013: c53,12 r1
  circle w0.013: c53,0 r1
  circle w0.013: c53,-12 r1
  circle w0.013: c53,-24 r1
  lines w0.013: 1,-31.577 ccw(c3,-31.577) 3.309,-33.553 cw(c4.003,-37.999) 8.503,-38 ccw(c10.503,-38) 10.503,-40 44.496,-40 ccw(c44.497,-38) 46.497,-38.001 cw(c50.996,-38.002) 49.621,-33.718 ccw(c49.009,-31.814) 51.009,-31.815 51.009,-27.5 ccw(c49.009,-27.5) 49.009,-25.5 31,-25.5 cw(c31,-24.5) 30,-24.5 30,-23.5 cw(c31,-23.5) 31,-22.5 49.009,-22.5 ccw(c49.009,-20.5) 51.009,-20.5 51.009,-15.5 ccw(c49.009,-15.5) 49.009,-13.5 31,-13.5 cw(c31,-12.5) 30,-12.5 30,-11.5 cw(c31,-11.5) 31,-10.5 49.009,-10.5 ccw(c49.009,-8.5) 51.009,-8.5 51.009,-3.5 ccw(c49.009,-3.5) 49.009,-1.5 31,-1.5 cw(c31,-0.5) 30,-0.5 30,0.5 cw(c31,0.5) 31,1.5 49.009,1.5 ccw(c49.009,3.5) 51.009,3.5 51.009,8.5 ccw(c49.009,8.5) 49.009,10.5 31,10.5 cw(c31,11.5) 30,11.5 30,12.5 cw(c31,12.5) 31,13.5 49.009,13.5 ccw(c49.009,15.5) 51.009,15.5 51.009,20.5 ccw(c49.009,20.5) 49.009,22.5 31,22.5 cw(c31,23.5) 30,23.5 30,24.5 cw(c31,24.5) 31,25.5 49.009,25.5 ccw(c49.009,27.5) 51.009,27.5 51.009,31.815 ccw(c49.009,31.815) 49.624,33.718 cw(c51.009,38) 46.509,38 ccw(c44.509,38) 44.509,40 10.502,40 ccw(c10.502,38) 8.502,38 cw(c4.002,38) 3.308,33.554 ccw(c3,31.578) 1,31.578 1,-31.577

## Text inside footprints (layer, text, board x,y; h text height)
J3: Mechanical 1 "J1" at 47.13,17.623 h0.5
J4: Mechanical 1 "J1" at 47.13,5.623 h0.5
J5: Mechanical 1 "J1" at 47.13,-6.377 h0.5
J7: Mechanical 1 "J1" at 47.13,-18.377 h0.5